# Altium PCB Quadruped.PcbDoc
Units mm, origin at the board's own origin, x right, y up, seen from the top; angles counter-clockwise.
Board outline 100.35 x 66.23 mm, 2 copper layers (Top Layer, Bottom Layer), stack 1.671 mm thick; 19 components, 32 nets, 122 pads, 0 vias.
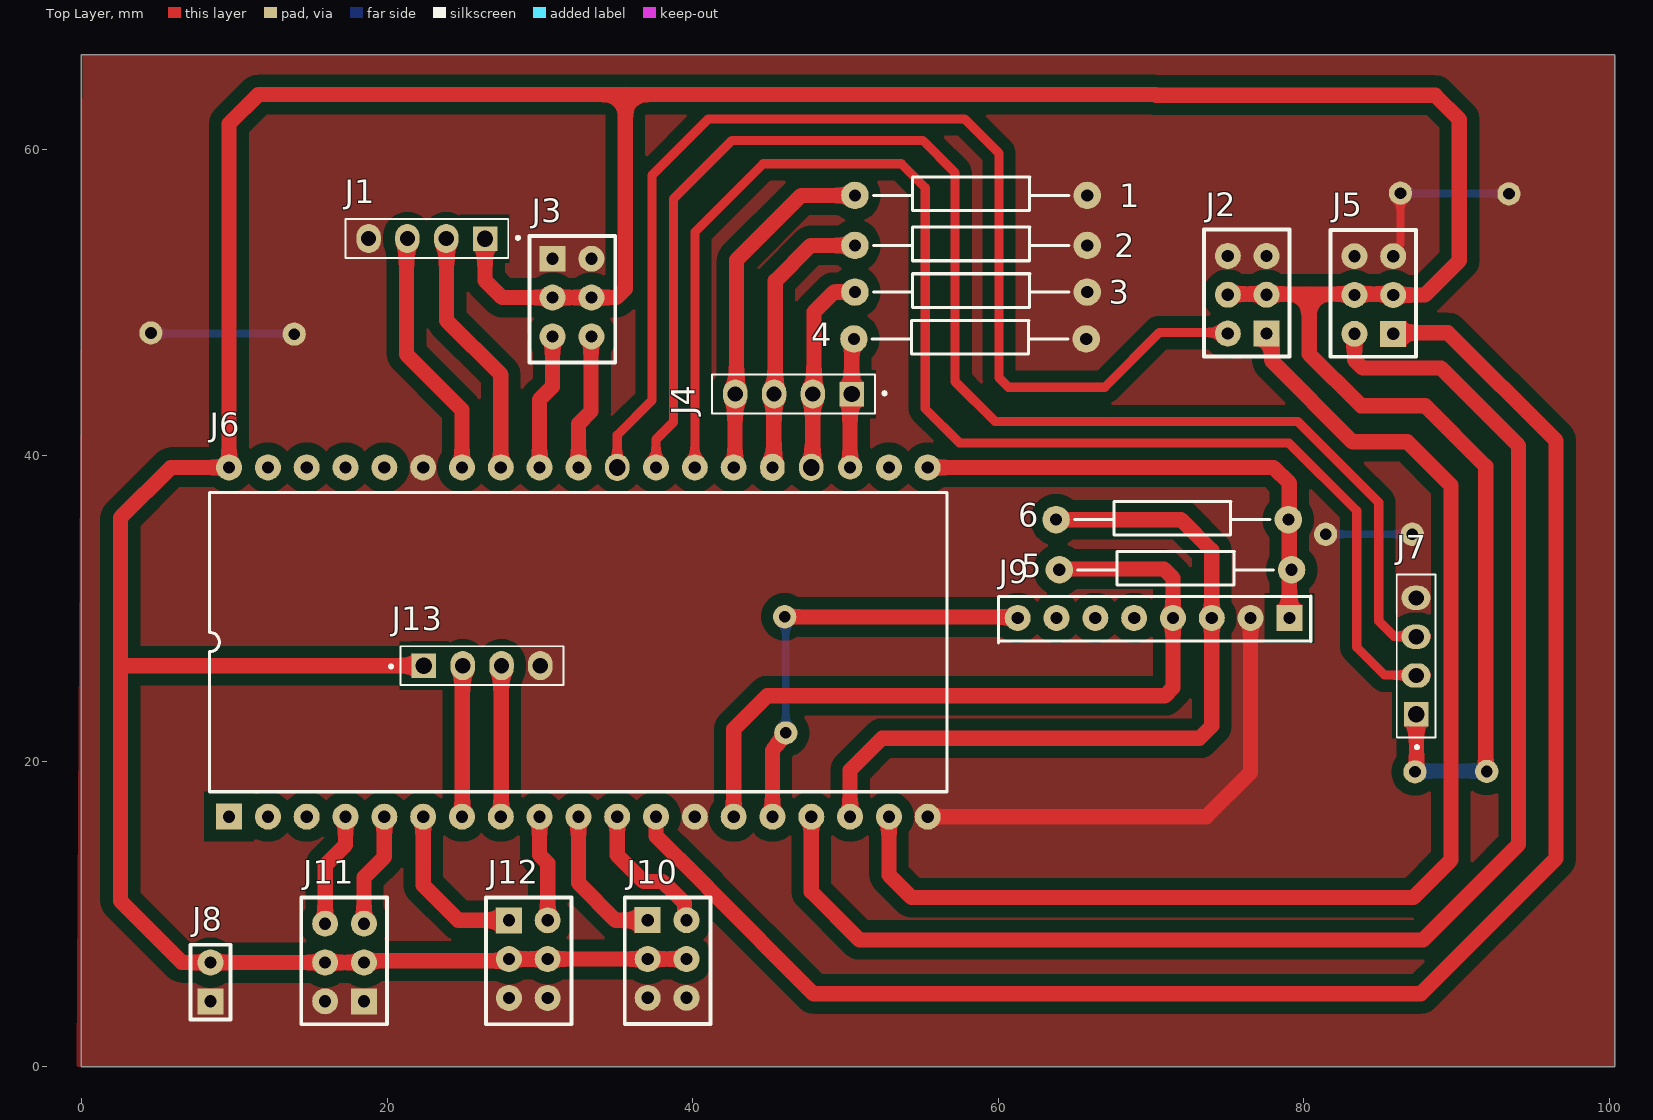
[diagram p0: Top Layer view]
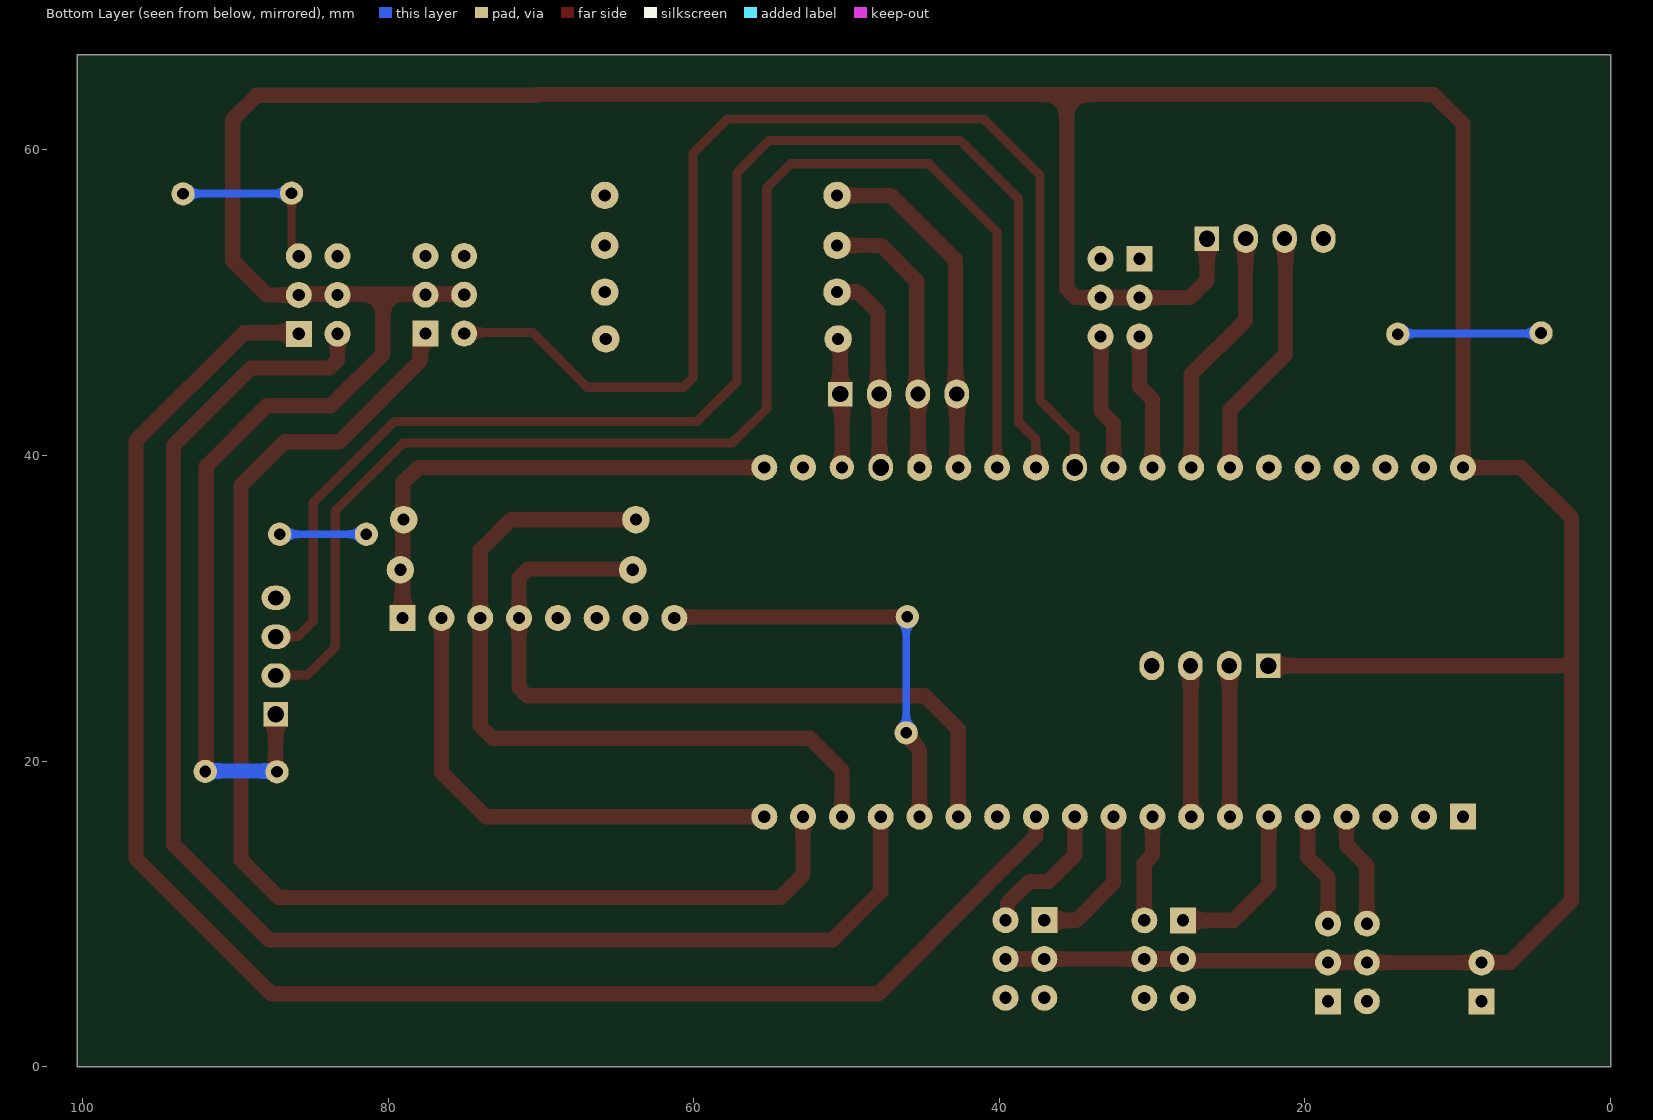
[diagram p1: Bottom Layer view, seen from below]

## Layer stack, top to bottom
Top Solder: solder mask 0.0102, Solder Resist, Dk 3.5
Top Layer: signal copper 0.0356
Dielectric 1: dielectric 1.6, FR-4, Dk 4.8
Bottom Layer: signal copper 0.0356
Bottom Solder: solder mask 0.0102, Solder Resist, Dk 3.5

## Board outline
0,0 100.35,0 100.35,66.225 0,66.225

## Design rules (kind name [scope] priority, off if disabled: settings)
Clearance [All] p1: gap=0.8 ignorepadtopadclearanceinfootprint=FALSE
PolygonConnect PolygonConnect_1 [All vs IsNamedPolygon('GND_L01_P000')] p1: thpad.connectstyle=Direct thpad.reliefconductorwidth=0.254 thpad.reliefentries=4 thpad.polygonreliefangle="90 Angle" thpad.airgapwidth=0.254 smdpad.connectstyle=Direct smdpad.reliefconductorwidth=0.254 smdpad.reliefentries=4 smdpad.polygonreliefangle="90 Angle" smdpad.airgapwidth=0.254 via.connectstyle=Relief via.reliefconductorwidth=0.254 via.reliefentries=4 via.polygonreliefangle="90 Angle" via.airgapwidth=0.254
PolygonConnect [All] p2: connectstyle=Relief reliefconductorwidth=0.254 reliefentries=4 polygonreliefangle="90 Angle" airgapwidth=0.254
RoutingVias [All] p1: holewidth=0.3 width=0.6 viastyle="Through Hole" minholewidth=0.3 minwidth=0.6 maxholewidth=0.3 maxwidth=0.6
SilkToSolderMaskClearance [IsPad] p1: minsilkscreentomaskgap=0.1 clearancetoexposedcopper=TRUE
SolderMaskExpansion [All] p1: expansion=0.102 istentingtop=FALSE
Width [All] p1: maxlimit=1 minlimit=0.5 preferedwidth=0.5
29 further rules are at their usual default settings.

## Components (designator, comment, footprint, x,y, rotation, side; value= is the part's Value field where it differs from the comment)
1 "CF1/2CT52R103J" "10K 1/2W" 50.625,57.025 r0 top value=10kR
2 "CF1/2CT52R103J" "10K 1/2W" 50.625,53.75 r0 top value=10kR
3 "CF1/2CT52R103J" "10K 1/2W" 50.625,50.7 r0 top value=10kR
4 "CF1/2CT52R103J" "10K 1/2W" 50.557,47.632 r0 top value=10kR
5 "CF1/2CT52R103J" "10K 1/2W" 64,32.525 r0 top value=10kR
6 "CF1/2CT52R103J" "10K 1/2W" 63.788,35.808 r0 top value=10kR
J1 "4 POS Female Header" SULLINS_PPTC041LFBN-RC 22.605,54.2 r180 top
J2 "10-89-7061" 3x2_MALE_HEADER 77.565,47.985 r180 top
J3 "10-89-7061" 3X2_MALE_HEADER 30.835,52.88 r0 top
J4 "4 POS Female Header" SULLINS_PPTC041LFBN-RC 46.6,44.025 r180 top
J5 "10-89-7061" 3X2_MALE_HEADER 85.85,47.97 r180 top
J6 "19 POS Female Header" ESP_32 9.665,16.365 r90 top
J7 "4 POS Female Header" SULLINS_PPTC041LFBN-RC 87.35,26.875 r90 top
J8 "M20-9990246" 2x1_MALE_HEADER 8.45,4.285 r180 top
J9 "PPTC081LFBN-RC" 8POS_FEMALE_HEADER 79.055,29.375 r270 top
J10 "10-89-7061" 3X2_MALE_HEADER 37.06,9.59 r0 top
J11 "10-89-7061" 3X2_MALE_HEADER 18.49,4.285 r180 top
J12 "10-89-7061" 3X2_MALE_HEADER 27.975,9.585 r0 top
J13 "4 POS Female Header" SULLINS_PPTC041LFBN-RC 26.225,26.25 r0 top

## Footprints (in the part's own frame and the unit in brackets; to place one, negate y for a bottom-side part, rotate by r counter-clockwise, add the part's x,y. Pads: shape width x height; smd on the part's side, far side on the other; paste and mask are expansions set on the pad)
2x1_MALE_HEADER [mm]
  rect 1.7x1.7 hole 0.8: 1(0,0)
  round 1.7 hole 0.8: 2(0,-2.54)
  silkscreen extent -1.3,-3.7 1.3,1.2, body extent -1.3,-3.84 1.24,1.24, height 8.45
3x2_MALE_HEADER [mm]
  rect 1.7x1.7 hole 0.8: 1(0,0)
  round 1.7 hole 0.8: 2(2.54,0) 3(0,-2.54) 4(2.54,-2.54) 5(0,-5.08) 6(2.54,-5.08)
  silkscreen extent -1.5,-6.8 4.1,1.5, body extent -1.27,-6.35 3.84,1.31, height 9.21
3X2_MALE_HEADER [mm]
  rect 1.7x1.7 hole 0.8: 1(0,0)
  round 1.7 hole 0.8: 2(2.54,0) 3(0,-2.54) 4(2.54,-2.54) 5(0,-5.08) 6(2.54,-5.08)
  silkscreen extent -1.5,-6.8 4.1,1.5, body extent -1.27,-6.35 3.84,1.31, height 9.21
8POS_FEMALE_HEADER [mm]
  rect 1.7x1.7 hole 0.8: 1(0,0)
  round 1.7 hole 0.8: 2(0,-2.54) 3(0,-5.08) 4(0,-7.62) 5(0,-10.16) 6(0,-12.7) 7(0,-15.24) 8(0,-17.78)
  silkscreen extent -1.4,-19.05 1.63,1.4, body extent -1.24,-19.27 1.3,1.33, height 8.52
"10K 1/2W" [mm]
  round 1.8 hole 0.8: 1(0,0) 2(15.2,0)
  silkscreen extent 1.2,-1 14,1.2
ESP_32 [mm]
  rect 1.7x1.7 hole 0.8: 1(0,0)
  round 1.7 hole 0.8: 2(0,-2.54) 3(0,-5.08) 4(0,-7.62) 5(0,-10.16) 6(0,-12.7) 7(0,-15.24) 8(0,-17.78) 9(0,-20.32) 10(0,-22.86) 11(0,-25.4) 12(0,-27.94) 13(0,-30.48) 14(0,-33.02) 15(0,-35.56) 16(0,-38.1) 17(0,-40.64) 18(0,-43.18) 19(0,-45.72) 20(22.86,0) 21(22.86,-2.54) 22(22.86,-5.08) 23(22.86,-7.62) 24(22.86,-10.16) 25(22.86,-12.7) 26(22.86,-15.24) 27(22.86,-17.78) 28(22.86,-20.32) 29(22.86,-22.86) 31(22.86,-27.94) 32(22.86,-30.48) 33(22.86,-33.02) 37(22.86,-43.18) 38(22.86,-45.72)
  oval 1.8x1.6 hole 1.1: 30(22.86,-25.4) 35(22.86,-38.1)
  oval 1.8x1.6 hole 0.8: 34(22.86,-35.56)
  round 1.6 hole 0.8: 36(22.86,-40.64)
  silkscreen extent 1.63,-46.99 21.22,1.27, body extent -1.27,-47.73 24.13,1.52, height 8.52
SULLINS_PPTC041LFBN-RC [mm]
  rect 1.605x1.605 / inner round 1.605 / far side rect 1.605x1.605 hole 1.07: 1(-3.81,0)
  oval 1.6x1.9 hole 1: 2(-1.27,0) 3(1.27,0) 4(3.81,0)
  silkscreen extent -6.06,-1.27 5.33,1.27, body extent -5.33,-1.27 5.33,1.27, height 8.51

## Part data
1 2 3 4 5 6: "Res, 10K, 0.5W, Axial, Carbon Film Rohs Compliant: Yes", Case/Package=Conformal, Manufacturer="KOA Speer", Max Operating Temperature=155°C, Min Operating Temperature=-55°C, Package Quantity=4000, Power Rating=500mW, Supplier Part Number=2019-CF1/2CT52R103JCT-ND, Temperature Coefficient=350ppm/°C, Tolerance=5%, Voltage Rating=400V, Category="Through-Hole Resistors", ComponentLink1Description=https://datasheet.ciiva.com/5478/cf-5478522.pdf?src-supplier=Mouser, ComponentLink1URL=https://datasheet.ciiva.com/5478/cf-5478522.pdf?src-supplier=Mouser, ComponentLink2Description=https://datasheet.octopart.com/CF1-2CT52R103J-KOA-Speer-datasheet-149521760.pdf?src-supplier=Farnell, ComponentLink2URL=https://datasheet.octopart.com/CF1-2CT52R103J-KOA-Speer-datasheet-149521760.pdf?src-supplier=Farnell, ComponentLink3Description=https://datasheet.octopart.com/CF1/2CT52R103J-KOA-Speer-datasheet-160006.pdf?src-supplier=Mouser, ComponentLink3URL=https://datasheet.octopart.com/CF1/2CT52R103J-KOA-Speer-datasheet-160006.pdf?src-supplier=Mouser, Construction=Cylindrical, Length=8.5mm, Manufacturer Part Number=CF1/2CT52R103J, Military Standard=Not, Mounting Technology="Through Hole", Packaging="Tape and Reel", Pricing="1=0.12, 10=0.104, 25=0.072, 50=0.0558, 100=0.0399, 250=0.03112, 500=0.02474, 1000=0.01755 (USD)", RoHS Compliant=Yes, Series=CF, Stock=26977, Supplier=Digi-Key, Termination=Axial
J1 J7: library part PPPC041LFBN-RC_OPPOSITE, "CONN HDR 4POS 0.1 GOLD PCB", Manufacturer=Sullins, Manufacturer Part Number=PPPC041LFBN-RC, Supplier Part Number=S7037-ND, Category=Connectors, ComponentLink1Description=https://media.digikey.com/pdf/Data%20Sheets/Sullins%20PDFs/Female_Headers.100_DS.pdf?src-supplier=Digi-Key, ComponentLink1URL=https://media.digikey.com/pdf/Data%20Sheets/Sullins%20PDFs/Female_Headers.100_DS.pdf?src-supplier=Digi-Key, ComponentLink2Description=http://www.sullinscorp.com/catalogs/78_Page80-81_HEADER_.100_2.54mm_FEMALE.pdf?src-supplier=Future+Electronics, ComponentLink2URL=http://www.sullinscorp.com/catalogs/78_Page80-81_HEADER_.100_2.54mm_FEMALE.pdf?src-supplier=Future+Electronics, ComponentLink3Description=https://datasheet.octopart.com/PPPC041LFBN-RC-Sullins-datasheet-41308905.pdf?src-supplier=Future+Electronics, ComponentLink3URL=https://datasheet.octopart.com/PPPC041LFBN-RC-Sullins-datasheet-41308905.pdf?src-supplier=Future+Electronics, Pricing="1=0.47, 10=0.411, 100=0.3391, 500=0.29484, 1000=0.24324, 5000=0.21376, 10000=0.2106 (USD)", RoHS=Yes, Stock=27520, Supplier=Digi-Key
J2 J3 J5 J10 J11 J12: library part 2654a11fb13586ecb194516b1c997bc, "CONN HEADER VERT 6POS 2.54MM", Color=Black, Contact Resistance=15mR, Current Rating=3A, Flammability Rating="UL94 V-0", Package Quantity=1, Voltage Rating=250V, Connector Type="Male Pin", Contact Gender=Male, Contact Material=Brass, Contact Mating Length=0.24inch, Contact Plating=Tin, Contact Type="Male Pin", Depth=5.08mm, ELV=Compliant, Gender=Male, Glow Wire Compliant=Non-compliant, Halogen Free="Low Halogen", Housing Color=Black, Housing Material=Thermoplastic, Lead Free="Lead Free", Material="Copper Alloy", Mount="Through Hole", Number of Circuits=6, Number of Contacts=6, Number of Positions=6, Number of Rows=2, Orientation=Straight, Packaging=Bulk, Pitch=2.54mm, Radiation Hardening=No, RoHS Compliant=Yes, Row Spacing=0.1inch, Series="C-Grid® 70280", Termination=Solder, Voltage Rating (DC)=250V
J4 J13: library part PPPC041LFBN-RC, "CONN HDR 4POS 0.1 GOLD PCB", Manufacturer=Sullins, Supplier Part Number=S7037-ND, Category=Connectors, ComponentLink1Description=https://media.digikey.com/pdf/Data%20Sheets/Sullins%20PDFs/Female_Headers.100_DS.pdf?src-supplier=Digi-Key, ComponentLink1URL=https://media.digikey.com/pdf/Data%20Sheets/Sullins%20PDFs/Female_Headers.100_DS.pdf?src-supplier=Digi-Key, ComponentLink2Description=http://www.sullinscorp.com/catalogs/78_Page80-81_HEADER_.100_2.54mm_FEMALE.pdf?src-supplier=Future+Electronics, ComponentLink2URL=http://www.sullinscorp.com/catalogs/78_Page80-81_HEADER_.100_2.54mm_FEMALE.pdf?src-supplier=Future+Electronics, ComponentLink3Description=https://datasheet.octopart.com/PPPC041LFBN-RC-Sullins-datasheet-41308905.pdf?src-supplier=Future+Electronics, ComponentLink3URL=https://datasheet.octopart.com/PPPC041LFBN-RC-Sullins-datasheet-41308905.pdf?src-supplier=Future+Electronics, Manufacturer Part Number=PPPC041LFBN-RC, Pricing="1=0.47, 10=0.411, 100=0.3391, 500=0.29484, 1000=0.24324, 5000=0.21376, 10000=0.2106 (USD)", RoHS=Yes, Stock=27520, Supplier=Digi-Key
J6: library part PPTC191LFBN-RC, "CONN HDR 19POS 0.1 TIN PCB", Flammability Rating="UL94 V-0", Insulation Color=Black, Manufacturer=Sullins, Max Operating Temperature=105°C, Min Operating Temperature=-40°C, Supplier Part Number=S7017-ND, Voltage Rating=250V, Category=Connectors, ComponentLink1Description=https://s3.amazonaws.com/catalogspreads-pdf/PAGE114-115%20.100%20FEMALE%20HDR.pdf?src-supplier=Digi-Key, ComponentLink1URL=https://s3.amazonaws.com/catalogspreads-pdf/PAGE114-115%20.100%20FEMALE%20HDR.pdf?src-supplier=Digi-Key, Connector Type=Header, Contact Finish - Mating=TIN, Contact Material=Bronze, Contact Shape=Square, Contact Type="Female Socket", Fastening Type=Pull, Height=8.5mm, Housing Material=Plastic, Insulation Material=Polyester, Lead Free="Lead Free", Length=48.8mm, Manufacturer Part Number=PPTC191LFBN-RC, Mounting Technology="Through Hole", Number of Positions=19, Number of Rows=1, Packaging=Tray, Pricing="1=1.18, 10=0.997, 80=0.89488, 440=0.73218, 1000=0.65083, 5000=0.5811 (USD)", RoHS=Yes, RoHS Compliant=Yes, Series=-, Stock=11638, Supplier=Digi-Key, Termination=Solder, Width=2.5mm
J8: "2.54mm (0.1\") Pitch SIL Vertical PC Tail Pin Header, 6.1mm mating pin height, tin, 2 contacts", Manufacturer=Harwin, Supplier Part Number=7457065, Category="Headers and Wire Housings", ComponentLink1Description=https://datasheet.ciiva.com/8046/315376-8046930.pdf?src-supplier=Element14, ComponentLink1URL=https://datasheet.ciiva.com/8046/315376-8046930.pdf?src-supplier=Element14, ComponentLink2Description=https://datasheet.ciiva.com/11745/0900766b81034e61-11745755.pdf?src-supplier=Rs, ComponentLink2URL=https://datasheet.ciiva.com/11745/0900766b81034e61-11745755.pdf?src-supplier=Rs, ComponentLink3Description=https://datasheet.ciiva.com/22660/1830818-22660571.pdf?src-supplier=Element14, ComponentLink3URL=https://datasheet.ciiva.com/22660/1830818-22660571.pdf?src-supplier=Element14, ComponentLink4Description=https://datasheet.ciiva.com/6833/m20-999-6833368.pdf?src-supplier=Digi-Key, ComponentLink4URL=https://datasheet.ciiva.com/6833/m20-999-6833368.pdf?src-supplier=Digi-Key, ComponentLink5Description=https://datasheet.ciiva.com/26852/getdatasheetpartid-384170-26852203.pdf?src-supplier=Verical, ComponentLink5URL=https://datasheet.ciiva.com/26852/getdatasheetpartid-384170-26852203.pdf?src-supplier=Verical, Manufacturer Part Number=M20-9990246, RoHS=Yes, Stock=4090, Supplier=Rs
J9: "Female, 8C, Straight, .100\"CC; 3.20mm Tail, No Mt. 100u\" Tin; PBT, Phos Bronze, 105 C", Manufacturer=Sullins, Supplier Part Number=S7006-ND, Category=Connectors, ComponentLink1Description=https://media.digikey.com/pdf/Data%20Sheets/Sullins%20PDFs/Female_Headers.100_DS.pdf?src-supplier=Digi-Key, ComponentLink1URL=https://media.digikey.com/pdf/Data%20Sheets/Sullins%20PDFs/Female_Headers.100_DS.pdf?src-supplier=Digi-Key, ComponentLink2Description=https://datasheet.octopart.com/PPTC081LFBN-RC-Sullins-datasheet-41308905.pdf?src-supplier=Future+Electronics, ComponentLink2URL=https://datasheet.octopart.com/PPTC081LFBN-RC-Sullins-datasheet-41308905.pdf?src-supplier=Future+Electronics, ComponentLink3Description=http://www.sullinscorp.com/catalogs/78_Page80-81_HEADER_.100_2.54mm_FEMALE.pdf?src-supplier=Future+Electronics, ComponentLink3URL=http://www.sullinscorp.com/catalogs/78_Page80-81_HEADER_.100_2.54mm_FEMALE.pdf?src-supplier=Future+Electronics, Manufacturer Part Number=PPTC081LFBN-RC, Pricing="1=0.65, 10=0.565, 400=0.42525, 800=0.3645, 1200=0.33413, 5200=0.29363, 10000=0.2925 (USD)", RoHS=Yes, Stock=25448, Supplier=Digi-Key

## Free pads (board coordinates)
  round 1.524 hole 0.762: 5(46.1,21.85) 6(46.025,29.45) 11(86.325,57.175) 12(93.425,57.125) 13(13.925,47.95) 14(4.55,48.025) 15(87.275,19.3) 16(91.971,19.326) 17(81.425,34.85) 18(87.1,34.85)

## Nets (pads, with @x,y where several pads share a name; then routed paths per layer and width w, separated by ;. In a path a pad name is that pad's centre, name@x,y a point inside that pad or via, vN(x,y) a via of type N, cw(c..) or ccw(c..) an arc to the next point about the centre after c; other vN are vias at no path point)
3V3: 5.2 6.2 J6.38 J9.1 | length 33.1
  Top Layer w1: J6.38 78.021,39.225 79.055,38.191 79.055,36.059 78.988,35.992 78.988,35.954 79.042,35.9 78.988,35.846 6.2 79.055,35.741 79.055,33.124 79.162,33.017 79.162,32.979 79.108,32.925 79.162,32.871 79.162,32.833 79.055,32.726 J9.1
GND: 1.2 2.2 3.2 4.2 J1.4 J2.5 J2.6 J3.1 J3.2 J5.5 J5.6 J6.13 J6.19 J6.25 J7.4 J8.1 J9.2 J10.5 J10.6 J11.1 J11.2 J12.5 J12.6 J13.4 pad.11 pad.12 pad.13 pad.14 pad.17 pad.18 | length 59
  Top Layer w0.5: J5.5 85.85,53.375 86.325,53.85 pad.11
  Top Layer w1: J6.19 73.615,16.365 76.515,19.265 J9.2
  Bottom Layer w0.5: pad.14 4.587,47.987 13.888,47.987 pad.13 ; pad.17 pad.18 ; pad.11 86.35,57.15 93.4,57.15 pad.12
Net1_1: 1.1 J4.4 J6.33 | length 23.2
  Top Layer w1: J6.33 42.777,39.317 42.777,43.857 42.87,43.95 42.87,52.795 47.1,57.025 1.1
Net1_2: 
Net2_1: 2.1 J4.3 J6.34 | length 18.5
  Top Layer w1: J6.34 45.317,39.317 45.317,43.857 45.41,43.95 45.41,51.435 47.725,53.75 2.1
Net3_1: 3.1 J4.2 J6.35 | length 13.5
  Top Layer w1: J6.35 47.857,39.317 47.857,43.857 47.95,43.95 47.95,49.4 49.25,50.7 3.1
Net4_1: 4.1 J4.1 J6.36 | length 8.5
  Top Layer w1: J6.36 50.305,43.765 J4.1@50.49,43.95 ; J4.1 50.41,47.485 4.1
Net5_1: 5.1 J6.14 J9.4 | length 50.6
  Top Layer w1: J6.14 42.685,22.085 44.875,24.275 70.9,24.275 71.435,24.81 J9.4 71.435,31.989 70.849,32.575 64.191,32.575 64.18,32.563 5.1@63.908,32.563
Net6_1: 6.1 J6.17 J9.3 | length 50.4
  Top Layer w1: J6.17 50.305,19.405 52.4,21.5 73.175,21.5 73.975,22.3 J9.3 73.975,33.8 71.967,35.808 6.1
NetJ1_1: 
NetJ1_2: J1.2 J6.27 | length 16.2
  Top Layer w1: J1.2@23.9,53.927 23.9,48.841 27.445,45.296 J6.27
NetJ1_3: J1.3 J6.26 | length 16.5
  Top Layer w1: J1.3@21.275,54.233 21.275,46.625 24.905,42.995 J6.26
NetJ1_4: 
NetJ2_1: J2.1 J6.18 | length 83.8
  Top Layer w1: J6.18 52.845,12.555 54.325,11.075 87.175,11.075 89.625,13.525 89.625,38.05 86.775,40.9 83.193,40.9 77.915,46.178 77.915,47.635 J2.1
NetJ2_2: J2.2 J6.30 | length 75.9
  Top Layer w0.6: J6.30 35.065,41.34 37.345,43.62 37.345,58.345 41.025,62.025 57.8,62.025 60.05,59.775 60.05,45.1 60.675,44.475 66.975,44.475 70.55,48.05 J2.2@74.322,48.05
NetJ2_3: J1.1 J2.3 J2.4 J3.3 J3.4 J5.3 J5.4 J6.20 J7.1 J8.2 J10.3 J10.4 J11.3 J11.4 J12.3 J12.4 J13.1 pad.15 pad.16 | length 294.3
  Top Layer w0.5: 2.557,26.45 2.757,26.25 ; pad.15 87.373,19.627 pad.15@87.373,19.834 ; J7.1@87.35,23.065 J7.1@87.354,22.512
  Top Layer w1: 2.757,26.25 J13.1 ; J1.1 26.415,51.46 27.535,50.34 J3.3 J3.4 35.014,50.34 35.6,50.926 35.6,63.625 ; J12.4 J12.3 27.862,6.933 18.598,6.933 J11.3 J11.4 J8.2 6.575,6.825 2.557,10.843 2.557,26.45 2.557,35.932 5.85,39.225 J6.20 9.665,61.715 11.575,63.625 35.6,63.625 ; J12.4@30.52,7.05 J10.3 J10.4 ; J2.4@75.025,50.575 80.35,50.575 ; J5.3 87.918,50.51 90.175,52.767 90.175,62 88.6,63.575 70.35,63.575 70.3,63.625 35.6,63.625 ; J5.3@85.85,50.575 80.35,50.575 ; J7.1@87.354,22.512 pad.15@87.373,19.834 ; pad.16@91.9,19.326 91.9,39.3 87.938,43.262 83.738,43.262 80.35,46.65 80.35,50.575
  Bottom Layer w1: pad.15@87.331,19.355 91.942,19.355 pad.16
NetJ2_5: 
NetJ3_5: J3.5 J6.28 | length 8.9
  Top Layer w1: J6.28 29.985,43.66 30.835,44.51 J3.5
NetJ3_6: J3.6 J6.29 | length 9.1
  Top Layer w1: J6.29 32.525,42.075 33.35,42.9 J3.6@33.35,48.024
NetJ5_1: J5.1 J6.12 | length 109
  Top Layer w1: J6.12 37.61,16.36 37.61,15.09 39.16,13.54 39.194,13.54 41.01,11.724 41.01,11.69 47.925,4.775 87.65,4.775 96.5,13.625 96.5,40.975 89.44,48.035 J5.1@85.85,48.035
NetJ5_2: J5.2 J6.16 | length 96
  Top Layer w1: J6.16 47.765,11.46 50.925,8.3 87.8,8.3 94.05,14.55 94.05,40.65 88.975,45.725 83.85,45.725 83.31,46.265 J5.2
NetJ6_4: J6.4 J11.6 | length 7.6
  Top Layer w1: J11.6 15.95,13.175 17.285,14.51 J6.4
NetJ6_5: J6.5 J11.5 | length 7.6
  Top Layer w1: J11.5 18.49,12.401 19.825,13.736 J6.5
NetJ6_6: J6.6 J12.1 | length 11
  Top Layer w1: J6.6 22.365,11.885 24.665,9.585 J12.1
NetJ6_7: J6.7 J13.2 | length 9.9
  Top Layer w1: J6.7 24.93,16.39 24.93,26.225 J13.2
NetJ6_8: J6.8 J13.3 | length 9.9
  Top Layer w1: J6.8 27.47,16.39 27.47,26.225 J13.3
NetJ6_9: J6.9 J12.2 | length 7
  Top Layer w1: J6.9 29.985,13.865 30.515,13.335 J12.2
NetJ6_10: J6.10 J10.1 | length 9.9
  Top Layer w1: J6.10 32.525,12.025 34.965,9.585 J10.1@37.06,9.585
NetJ6_11: J6.11 J10.2 | length 9.4
  Top Layer w1: J6.11 35.065,13.86 36.8,12.125 38.029,12.125 38.414,11.74 38.448,11.74 39.466,10.722 39.466,9.724 J10.2
NetJ6_15: J6.15 J9.8 pad.5 pad.6 | length 28.7
  Top Layer w1: J6.15 45.225,20.7 pad.5 ; pad.6 61.225,29.425 J9.8
  Bottom Layer w0.5: pad.6 46.1,29.375 pad.5
NetJ6_31: J6.31 J7.3 | length 94.9
  Top Layer w0.6: J6.31 37.605,41.055 38.745,42.195 38.745,56.795 42.575,60.625 55.05,60.625 57.175,58.5 57.175,44.85 59.8,42.225 79.605,42.225 84.9,36.93 84.9,29.175 85.905,28.17 J7.3@88.025,28.17
NetJ6_32: J6.32 J7.2 | length 92.7
  Top Layer w0.6: J6.32 40.145,54.62 44.625,59.1 53.65,59.1 55.225,57.525 55.225,43.075 57.475,40.825 79.025,40.825 83.464,36.386 83.464,27.461 85.295,25.63 J7.2@88.025,25.63
pads on no net: J6.1 J6.2 J6.3 J6.21 J6.22 J6.23 J6.24 J6.37 J9.5 J9.6 J9.7

## Polygon pours and split planes (outlines as drawn)
GND on Top Layer "GND_L01_P000" (solid, pour order 0): 0.1,66.175 100.375,66.175 100.375,0.125 100.25,0 -0.3,0